# EAGLE board sensors_actuators_shieldv2_1 (EAGLE 6.6.0)
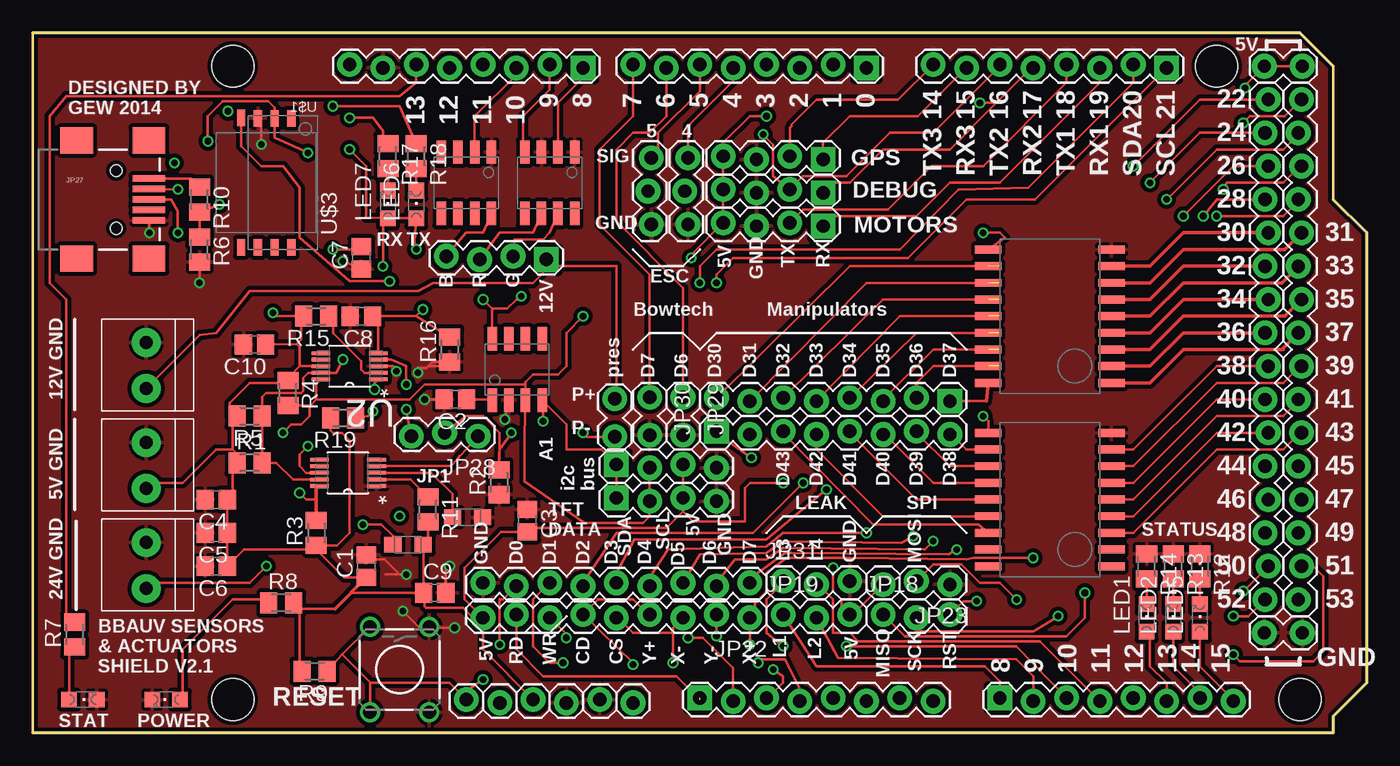
[diagram p0: board, top side]
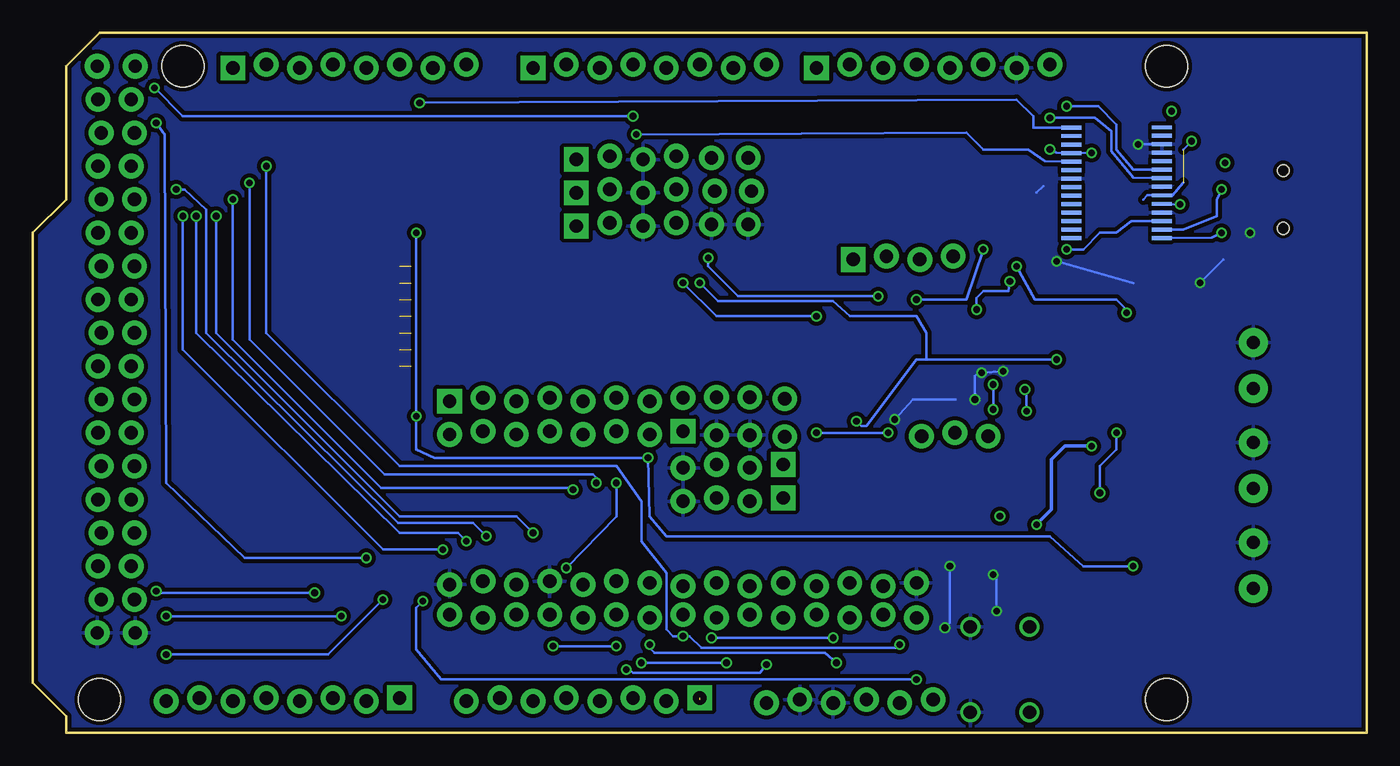
[diagram p1: board, bottom side, seen from below]

Size 101.6 x 53.34 mm. Coordinates in mm from the lower left corner, seen from the top.
Outline: 0,0 99.06,0 99.06,1.27 101.6,3.81 101.6,38.1 99.06,40.64 99.06,50.8 96.52,53.34 0,53.34 0,0
Copper layers (1*2*15*16): Top 0.035mm / dielectric 0.2mm / Route2 0.0175mm / dielectric 1.1mm / Route15 0.0175mm / dielectric 0.2mm / Bottom 0.035mm
Design rules "SeeedStudio_DRU_no_angle_20130527": minimum track width 6mil, minimum drill 12mil, track to track 6mil, track to pad 6mil, pad to pad 6mil, via to via 6mil, smd to smd 0mil, copper to edge 10mil, drill to drill 10mil, minimum pad ring 6mil, minimum via ring 6mil, stop-mask expansion 2mil, vias tented up to drill 25mil, thermal gap 10mil
Net classes: 0 default: width 0.178 mm, drill 0.508 mm, clearance 0.152 mm; 1 power: width 0.203 mm, drill 0.508 mm, clearance 1.27 mm
Holes 3.2 mm at 15.24,50.8 15.24,2.54 90.17,50.8 96.52,2.54

## Footprints (pad centres in the part's own frame; a part is rotated, then mirrored left to right if it is on the bottom)
0805 = smd 1.3 x 1.2: 1 -1.15,0; 2 1.15,0
C0805 = smd 1.3 x 1.5: 1 -0.85,0; 2 0.85,0
SOIC = smd 0.6 x 2: 1 -5.08,-4.7; 2 -3.81,-4.7; 3 -2.54,-4.7; 4 -1.27,-4.7; 5 0,-4.7; 6 1.27,-4.7; 7 2.54,-4.7; 8 3.81,-4.7; 9 5.08,-4.7; 10 5.08,4.7; 11 3.81,4.7; 12 2.54,4.7; 13 1.27,4.7; 14 0,4.7; 15 -1.27,4.7; 16 -2.54,4.7; 17 -3.81,4.7; 18 -5.08,4.7
1X2-3.5MM = drill 1 pad 2.184: 1 1.8,0; 2 -1.7,0
1X08_LOCK = drill 1.016 pad 1.88 square: 1 0,0.127 | drill 1.016 pad 1.88: 2 2.54,-0.127; 3 5.08,0.127; 4 7.62,-0.127; 5 10.16,0.127; 6 12.7,-0.127; 7 15.24,0.127; 8 17.78,-0.127
1X02_LOCK = drill 1.016 pad 1.88: 1 -0.178,0; 2 2.718,0
1X04_LOCK = drill 1.016 pad 1.88 square: 1 0,0.127 | drill 1.016 pad 1.88: 2 2.54,-0.127; 3 5.08,0.127; 4 7.62,-0.127
1X03_LOCK = drill 1.016 pad 1.88: 1 0,0.127; 2 2.54,-0.127; 3 5.08,0.127
1X16_LOCK = drill 1.016 pad 1.88: 1 0,0.127; 2 2.54,-0.127; 3 5.08,0.127; 4 7.62,-0.127; 5 10.16,0.127; 6 12.7,-0.127; 7 15.24,0.127; 8 17.78,-0.127; 9 20.32,0.127; 10 22.86,-0.127; 11 25.4,0.127; 12 27.94,-0.127; 13 30.48,0.127; 14 33.02,-0.127; 15 35.56,0.127; 16 38.1,-0.127
1X06_LOCK = drill 1.016 pad 1.88: 1 0,0; 2 2.54,-0.254; 3 5.08,0; 4 7.62,-0.254; 5 10.16,0; 6 12.7,-0.254
1X09_LOCK = drill 1.016 pad 1.88: 1 0,0.127; 2 2.54,-0.127; 3 5.08,0.127; 4 7.62,-0.127; 5 10.16,0.127; 6 12.7,-0.127; 7 15.24,0.127; 8 17.78,-0.127; 9 20.32,0.127
USB-MINIB = smd 2.5 x 0.5: D+ 2.5,0; D- 2.5,0.8; GND 2.5,-1.6; ID 2.5,-0.8; VBUS 2.5,1.6 | smd 2.5 x 2: MTN1 -3,4.5; MTN2 2.5,4.5; MTN3 -3,-4.5; MTN4 2.5,-4.5 | hole 0.9: 0,2.2; 0,-2.2
CHIPLED_0805 = smd 1.2 x 1.2: A 0,-1.05; C 0,1.05
SO-8 = smd 0.72 x 1.78: 1 -1.905,-2.34; 2 -0.635,-2.34; 3 0.635,-2.34; 4 1.905,-2.34; 5 1.905,2.34; 6 0.635,2.34; 7 -0.635,2.34; 8 -1.905,2.34
M0805 = smd 1.3 x 1.6: 1 -0.95,0; 2 0.95,0
TACTILE-PTH = drill 1.016: 1 -3.251,2.261; 2 3.251,2.261; 3 -3.251,-2.261; 4 3.251,-2.261
SOP50P490X110-10N = smd 1.422 x 0.279: 1 -2.184,0.991; 2 -2.184,0.508; 3 -2.184,0; 4 -2.184,-0.508; 5 -2.184,-0.991; 6 2.184,-0.991; 7 2.184,-0.508; 8 2.184,0; 9 2.184,0.508; 10 2.184,0.991
SSOP-28 = smd 1.5 x 0.3: 1 -3.45,4.2; 2 -3.45,3.575; 3 -3.45,2.925; 4 -3.45,2.275; 5 -3.45,1.625; 6 -3.45,0.975; 7 -3.45,0.325; 8 -3.45,-0.325; 9 -3.45,-0.975; 10 -3.45,-1.625; 11 -3.45,-2.275; 12 -3.45,-2.925; 13 -3.45,-3.575; 14 -3.45,-4.225; 15 3.45,-4.205; 16 3.45,-3.555; 17 3.45,-2.905; 18 3.45,-2.255; 19 3.45,-1.605; 20 3.45,-0.955; 21 3.45,-0.305; 22 3.45,0.345; 23 3.45,0.995; 24 3.45,1.645; 25 3.45,2.295; 26 3.45,2.945; 27 3.45,3.595; 28 3.45,4.22
SSOP-8 = smd 1.27 x 0.635: 1 4.915,-1.905; 2 4.915,-0.635; 3 4.915,0.635; 4 4.95,1.905; 5 -4.915,1.905; 6 -4.915,0.635; 7 -4.915,-0.635; 8 -4.915,-1.905

## Placement (x,y rotation side)
B1  MMZ2012Y152B0.4OHM,500MA  [0805]  33.12,16.43 0 top
B2  MMZ2012Y152B0.4OHM,500MA  [0805]  28.57,14.35 180 top
C1  1uF  [C0805]  25.4,12.7 90 top
C2  0.1uF  [C0805]  32.19,25.41 180 top
C3  0.22uF  [C0805]  37.66,16.18 270 top
C4  100nF  [C0805]  13.97,17.78 180 top
C5  100nF  [C0805]  13.97,15.24 180 top
C6  4.7uF  [C0805]  13.97,12.7 180 top
C7  1uF  [C0805]  25.02,36.2 90 top
C8  47pF  [C0805]  25.02,31.75 180 top
C9  100nF  [C0805]  30.61,10.67 0 top
C10  1uF  [C0805]  16.89,29.59 180 top
D1  ULN2803ADW  [SOIC]  77.47,17.78 90 top
D2  ULN2803ADW  [SOIC]  77.47,31.75 90 top
J1  1X2-3.5MM  [1X2-3.5MM]  8.64,27.94 90 top
J2  1X2-3.5MM  [1X2-3.5MM]  8.64,12.7 90 top
J3  1X2-3.5MM  [1X2-3.5MM]  8.64,20.32 90 top
JP1  [1X08_LOCK]  41.91,50.8 180 top
JP2  [1X08_LOCK]  63.5,50.8 180 top
JP3  [1X08_LOCK]  86.36,50.8 180 top
JP4  [1X02_LOCK]  93.98,50.8 0 top
JP5  [1X08_LOCK]  69.85,25.4 180 top
JP6  [1X08_LOCK]  52.07,22.86 0 top
JP7  [1X04_LOCK]  60.2,43.81 180 top
JP8  [1X04_LOCK]  60.2,41.27 180 top
JP9  [1X04_LOCK]  60.2,38.73 180 top
JP10  [1X03_LOCK]  46.99,43.81 270 top
JP11  [1X03_LOCK]  49.78,43.81 270 top
JP12  M16LOCK  [1X16_LOCK]  93.98,48.26 270 top
JP13  M16LOCK  [1X16_LOCK]  96.52,10.16 90 top
JP14  [1X02_LOCK]  93.98,7.62 0 top
JP15  [1X06_LOCK]  33.02,2.54 0 top
JP16  [1X08_LOCK]  50.8,2.54 0 top
JP17  [1X08_LOCK]  73.66,2.54 0 top
JP18  [1X03_LOCK]  64.77,8.89 0 top
JP19  [1X03_LOCK]  57.15,8.89 0 top
JP20  [1X04_LOCK]  44.45,20.32 0 top
JP21  [1X04_LOCK]  44.45,17.78 0 top
JP22  M09LOCK  [1X09_LOCK]  54.61,8.89 180 top
JP23  [1X03_LOCK]  69.85,11.43 180 top
JP24  [1X02_LOCK]  44.32,22.73 90 top
JP25  M09LOCK  [1X09_LOCK]  34.29,11.3 0 top
JP26  [1X04_LOCK]  39.12,36.2 180 top
JP27  USBSMD  [USB-MINIB]  6.35,40.64 0 top
JP28  [1X03_LOCK]  33.91,22.73 180 top
JP29  [1X02_LOCK]  49.53,25.4 270 top
JP30  [1X02_LOCK]  46.99,25.4 270 top
JP31  [1X03_LOCK]  57.15,11.43 0 top
LED1  BLUE  [CHIPLED_0805]  84.84,8.76 0 top
LED2  YELLOW  [CHIPLED_0805]  86.87,8.76 0 top
LED3  YELLOW  [CHIPLED_0805]  10.16,2.54 90 top
LED4  BLUE  [CHIPLED_0805]  3.81,2.54 270 top
LED5  RED  [CHIPLED_0805]  88.9,8.76 0 top
LED6  GREEN  [CHIPLED_0805]  29.21,40.26 0 top
LED7  GREEN  [CHIPLED_0805]  27.05,40.26 0 top
M1  IRF7910PBF  [SO-8]  39.37,41.91 180 top
M2  IRF7910PBF  [SO-8]  33.02,41.91 180 top
R1  1K  [M0805]  16.51,20.57 0 top
R2  250  [M0805]  35.51,19.1 90 top
R3  1K  [M0805]  21.59,15.24 90 top
R4  1K  [M0805]  19.43,25.91 270 top
R5  1K  [M0805]  16.51,24.13 180 top
R6  10k  [M0805]  12.7,36.83 270 top
R7  330  [M0805]  3.17,7.49 90 top
R8  330  [M0805]  18.92,9.91 0 top
R9  10k  [M0805]  21.46,4.7 180 top
R10  4k7  [M0805]  12.7,40.64 270 top
R11  1K  [M0805]  30.1,17.02 270 top
R12  330  [M0805]  88.9,12.7 270 top
R13  330  [M0805]  86.87,12.7 270 top
R14  330  [M0805]  84.84,12.7 270 top
R15  10K  [M0805]  21.59,31.75 180 top
R16  51K  [M0805]  31.75,29.21 90 top
R17  270  [M0805]  27.05,43.94 270 top
R18  270  [M0805]  29.21,43.94 270 top
R19  10K  [M0805]  23.62,24 180 top
S1  [TACTILE-PTH]  27.94,4.83 270 top
U1  ADS1115IDGST  [SOP50P490X110-10N]  24,19.81 180 top
U2  ADS1115IDGST  [SOP50P490X110-10N]  24.13,27.94 180 top
U$1  FT232RL  [SSOP-28]  19.05,41.91 0 bottom
U$2  HIH6130  [SO-8]  36.89,27.69 0 top
U$3  MPXH6250A  [SSOP-8]  17.78,41.91 90 top

## Library data of the parts
B1 B2 = bbauv; MPN: MMZ2012Y152B; OC_NEWARK: 89R3127
C1 C7 C10 = adafruit; MF: KEMET; MPN: C0805C105M4RACTU; OC_NEWARK: 42H5473
C2 = adafruit; MPN: 08055C104K4Z2A; OC_NEWARK: 10R5977
C3 = adafruit; MPN: CGA4J2X8R1E224K125AA; OC_NEWARK: 52W9749
C4 C5 C9 = adafruit; MPN: MC0805B104J500CT; OC_NEWARK: 06X6202
C6 = adafruit; MPN: C2012X5R1A475K125AA; OC_NEWARK: 04X3272
C8 = adafruit; MF: VISHAY/VITRAMON; MPN: VJ0805A470KXAMT; OC_NEWARK: 07J8429
D1 D2 = bbauv; MF: TEXAS INSTRUMENTS; MPN: ULN2803ADW; OC_NEWARK: 69K0711
J1-J3 = adafruit; MPN: 691103110002; OC_NEWARK: 16T1476
JP1-JP6 JP12-JP17 JP24 JP29 JP30 S1 = SparkFun; OC_NEWARK: unknown
JP7-JP11 JP18-JP23 JP25 JP26 JP28 JP31 = SparkFun-Connectors; OC_NEWARK: unknown
JP27 = SparkFun-Connectors; MF: MOLEX; MPN: 67503-1020; OC_NEWARK: 64K2160
LED1 LED4 = adafruit; MPN: 150080BS75000; OC_NEWARK: 95W3799
LED2 LED3 = adafruit; MPN: KP-2012SYCK-J3; OC_NEWARK: 96W6948
LED5 = adafruit; MPN: OVS-0808; OC_NEWARK: 15R2213
LED6 LED7 = adafruit; MF: SLI (CML/IDI); MPN: CMD17-21VGC/TR8; OC_NEWARK: 34C8661
M1 M2 = bbauv; MPN: IRF7910PBF; OC_NEWARK: 97K2234
R1 R3-R5 R11 = adafruit; MF: VISHAY/DALE; MPN: CRCW08051K00FKTA; OC_NEWARK: 05F1507
R2 = adafruit; MPN: PLTT0805Z2500AGTS; OC_NEWARK: 06X6591
R6 R9 = adafruit; MPN: MCHP05W4F1002T5E; OC_NEWARK: 01N6989
R7 R8 R12-R14 = adafruit; MPN: MCHP05W4F3300T5E; OC_NEWARK: 01N7024
R10 = adafruit; MPN: CR0805-JW-472ELF; OC_NEWARK: 06X5180
R15 R19 = adafruit; OC_NEWARK: unknown
R16 = adafruit; MF: OUTSOURCE ITEM; MPN: RR1220P-513-B-T5; OC_NEWARK: 28K1234
R17 R18 = adafruit; MPN: MC0805S8F2700T5E; OC_NEWARK: 79M6064
U1 U2 = bbauv; MPN: ADS1115IDGST; OC_FARNELL: 1762981; OC_NEWARK: 25R1241; PACKAGE: MSOP-10; SUPPLIER: Texas Instruments
U$1 U$3 = bbauv; OC_NEWARK: unknown
U$2 = bbauv; MPN: HIH6131-021-001; OC_NEWARK: 55T1170

## Nets
3.3: JP15.2
5V: B2.1 C1.1 C3.2 C4.1 C5.1 C6.1 C9.1 C10.1 J3.2 JP4.1 JP4.2 JP7.4 JP8.4 JP9.4 JP15.3 JP19.3 JP20.3 JP21.3 JP22.9 JP23.3 LED6.A LED7.A R1.1 R3.1 R4.1 R5.2 R8.2 R9.2 R11.2 R15.2 R19.2 U2.8 U$1.4 U$1.20 U$2.8 U$3.2
12V: J1.2 JP24.2 JP26.1
24V: D1.10 D2.10 J2.2 JP6.1
A0: JP16.1 JP22.8
A1: JP16.2 JP22.7
A2: JP16.3 JP22.4 JP22.6
A3: JP16.4 JP22.3 JP22.5
A4: JP16.5
A5: JP16.6
A6: JP16.7
A7: JP16.8
A8: JP17.1 JP19.1
A9: JP17.2 JP19.2
A10: JP17.3 JP31.1
A11: JP17.4 JP31.2
A12: JP17.5
A13: JP17.6 LED1.A
A14: JP17.7 LED2.A
A15: JP17.8 LED5.A
AREF: JP1.8
D2: JP2.3
D3: JP2.4
D4: JP2.5 JP11.1
D5: JP2.6 JP10.1
D6: JP2.7 JP29.1
D7: JP2.8 JP30.1
D8: JP1.1 M1.2
D9: JP1.2 M1.4
D10: JP1.3 M2.2
D11: JP1.4
D12: JP1.5
D13: JP1.6 R7.2
D22: JP12.1 JP22.2 JP25.2
D23: JP13.16 JP22.1 JP25.3
D24: JP12.2 JP25.4
D25: JP13.15 JP25.5
D26: JP12.3 JP25.6
D27: JP13.14 JP25.7
D28: JP12.4 JP25.8
D29: JP13.13 JP25.9
D30: D2.8 JP12.5
D31: D2.7 JP13.12
D32: D2.6 JP12.6
D33: D2.5 JP13.11
D34: D2.4 JP12.7
D35: D2.3 JP13.10
D36: D2.2 JP12.8
D37: D2.1 JP13.9
D38: D1.8 JP12.9
D39: D1.7 JP13.8
D40: D1.6 JP12.10
D41: D1.5 JP13.7
D42: D1.4 JP12.11
D43: D1.3 JP13.6
D44: JP12.12
D45: JP13.5
D46: JP12.13
D47: JP13.4
D48: JP12.14
D49: JP13.3
D50: JP12.15 JP18.1
D51: JP13.2 JP23.2
D52: JP12.16 JP18.2
D53: JP13.1
GND: B1.2 C1.2 C2.2 C3.1 C4.2 C5.2 C6.2 C7.1 C8.2 C9.2 C10.2 D1.9 D2.9 J1.1 J2.1 J3.1 JP1.7 JP7.3 JP8.3 JP9.3 JP10.3 JP11.3 JP14.1 JP14.2 JP15.4 JP15.5 JP20.4 JP21.4 JP23.1 JP25.1 JP27.GND JP29.2 JP30.2 JP31.3 LED3.C LED4.C M1.1 M1.3 M2.1 R2.1 R6.2 R12.1 R13.1 R14.1 R16.1 S1.1 S1.2 U1.1 U2.3 U$1.7 U$1.18 U$1.21 U$1.25 U$1.26 U$2.2 U$3.3
N$1: R6.1 R10.2 U$1.19
N$2: LED7.C R17.2
N$3: D1.16 JP6.3
N$4: D1.15 JP6.4
N$5: JP28.1 U1.4
N$6: B1.1 U1.3
N$7: D1.14 JP6.5
N$8: D1.13 JP6.6
N$9: D1.12 JP6.7
N$10: D1.11 JP6.8
N$11: D2.18 JP5.1
N$12: D2.17 JP5.2
N$13: D2.14 JP5.5
N$14: D2.15 JP5.4
N$15: D2.11 JP5.8
N$16: D2.13 JP5.6
N$17: D2.12 JP5.7
N$18: JP26.2 M1.7
N$19: D2.16 JP5.3
N$20: JP26.3 M1.6
N$21: JP26.4 M2.8
N$22: R11.1 U1.2
N$23: C2.1 U$2.1
N$24: B2.2 U1.8
N$25: LED1.C R14.2
N$26: JP27.VBUS R10.1
N$27: C7.2 U$1.17
N$28: LED2.C R13.2
N$29: LED5.C R12.2
N$30: R15.1 U2.2
N$31: LED6.C R18.2
N$34: R19.1 U2.1
N$126: LED3.A R8.1
N$127: LED4.A R7.1
PRES_SENSE: C8.1 R16.2 U2.5 U$3.4
RES: JP15.1 JP18.3 R9.1 S1.3 S1.4
RX0: JP2.1
RX1: JP3.3 JP9.1
RX2: JP3.5 JP8.1 U$1.1
RX3: JP3.7 JP7.1
RXLED: R17.1 U$1.22
SCL: JP3.1 JP20.2 JP21.2 R3.2 R4.2 U1.10 U2.10 U$2.3
SDA: JP3.2 JP20.1 JP21.1 R1.2 R5.1 U1.9 U2.9 U$2.4
SENSE: JP24.1 JP28.2 R2.2
SENSE2: JP28.3 U2.4
TX0: JP2.2
TX1: JP3.4 JP9.2
TX2: JP3.6 JP8.2 U$1.5
TX3: JP3.8 JP7.2
TXLED: R18.1 U$1.23
USBDM: JP27.D- U$1.16
USBDP: JP27.D+ U$1.15
VIN: JP15.6

## Tracks (layer width: path | path; a pad name or v marks a point on that pad's centre or on a via)
5V  (via drill 0.51)  (1 unrouted)
  Top 0.178: JP20.3 JP21.3 49.53,16.89 | R8.2 20.32,9.46 | 20.32,9.46 20.32,5.08 20.51,4.89 R9.2 | 20.32,9.46 23.01,9.46 24.22,10.67 C9.1 | v50.16,36.2 50.16,36.45 JP9.4 JP8.4 JP7.4 52.58,44.96 54.61,46.99 v55.88,46.99 | 34.98,32.33 U$2.8 | 15.24,21.59 15.24,23.81 R5.2 14.99,24.13 14.99,25.15 16.51,26.67 19.24,26.67 R4.1 19.43,27.05 20.32,27.94 | J3.2 9.07,19.05 11.43,19.05 13.97,21.59 15.24,21.59 | v13.34,45.09 13.34,46.99 14.48,48.13 17.91,48.13 18.41,47.62 U$3.2 18.41,45.34 v20.95,44.2 | R15.2 20.45,31.56 20.45,29.97 20.11,29.63 | 20.11,29.63 C10.1 | LED7.A LED6.A 29.05,36.83 v29.21,36.83 | v34.29,33.02 34.98,32.33 | U2.8 20.32,27.94 | 15.24,21.59 15.56,21.27 R1.1 15.24,20.25 15.24,17.78 C4.1 C5.1 C6.1 16.09,13.97 21.59,13.97 | 21.59,13.97 R3.1 23.18,14.29 24.13,15.24 24.13,22.29 23.56,22.86 22.86,22.86 22.67,23.05 R19.2 | 21.59,13.97 23.71,11.85 C1.1 | 20.64,32.07 R15.2 | 20.11,29.63 20.32,29.41 20.32,27.94 | JP23.3 62.48,9.02 JP19.3 61.59,9.65 61.59,10.16 60.96,10.79 v60.96,12.57 | v18.29,32 18.54,31.75 R15.2 | C9.1 29.76,14.32 B2.1 30.1,14.72 R11.2 | C9.1 29.84,10.58 29.84,9.65 29.97,9.53 32.77,9.53 33.53,8.76 JP22.9 | JP15.3 34.29,6.35 JP22.9 | JP22.9 32.89,10.16 32.89,12.57 35.65,15.33 C3.2 37.95,15.62 48.26,15.62 49.53,16.89 | 49.53,16.89 50.29,16.13 54.23,16.13 54.23,18.67 54.61,19.05 v57.15,19.05 | v92.33,49.15 92.33,49.33 JP4.1 JP4.2 | v26.67,35.56 26.67,38.83 LED7.A | 34.98,32.33 36.13,32.33 36.83,33.02 36.96,33.02 v37.21,33.27 | LED7.A 25.4,39.24 25.4,43.18 v24.13,44.45
  Top 0.254: 23.01,9.46 C1.1
  Bottom 0.178: v50.16,36.2 50.16,35.56 47.88,33.27 v37.21,33.27 | v29.21,36.83 30.48,33.02 v34.29,33.02 | v26.67,35.56 25.27,33.02 19.05,33.02 18.29,32.26 v18.29,32 | v60.96,12.57 57.15,16.51 v57.15,19.05 | v55.88,46.99 90.17,46.99 v92.33,49.15 | 17.02,40.64 16.7,40.95 U$1.20 14.86,40.89 13.97,41.91 | v24.13,44.45 23.62,44.2 U$1.4 v20.95,44.2 | v13.34,45.09 13.97,44.45
12V
  Top 0.178: J1.2 12.7,30.3 13.97,30.48 16.51,33.66 29.34,33.66 30.48,34.29 38.1,34.29 39.37,35.56 | JP24.2 44.45,25.58 44.45,35.56 39.37,35.56 | 39.37,35.56 JP26.1
24V  (via drill 0.51)
  Top 0.178: v72.39,38.1 73.66,38.1 74.04,37.72 D2.10 | v72.39,24.13 72.77,23.75 D1.10 | v54.74,20.95 52.07,22.86 JP6.1 | J2.2 9.07,11.43 16.51,11.43 v17.78,12.7
  Bottom 0.178: v72.39,38.1 v72.39,24.13 72.39,21.59 70.99,20.95 | v54.74,20.95 54.61,16.51 53.34,14.99 24.13,14.99 21.59,12.7 v17.78,12.7
  Bottom 0.203: v54.74,20.95 70.99,20.95
A0  (1 unrouted)
  Top 0.178: 50.8,2.54 49.02,4.32 38.86,4.32 36.83,6.35 JP22.8
A1  (via drill 0.51)
  Top 0.178: 53.21,2.54 JP16.2 53.34,4.95 51.05,7.24 v49.91,7.24 | v40.64,7.24 40.64,7.49 JP22.7
  Bottom 0.178: v49.91,7.24 v40.64,7.24
A2  (via drill 0.51)
  Top 0.178: v45.72,5.21 45.72,5.33 JP22.6 43.05,10.16 45.72,10.16 46.86,9.02 JP22.4 | JP16.3 56.01,2.67 57.15,3.81 57.15,4.32 v56.39,4.83
  Bottom 0.178: v45.72,5.21 46.23,4.57 55.88,4.57 56.13,4.83 v56.39,4.83
A3  (via drill 0.51)
  Top 0.178: JP16.4 58.42,3.3 57.28,5.59 55.37,5.59 55.24,5.46 v55.24,5.33 | v48.77,5.33 48.77,7.62 | 48.77,7.62 48.77,8 JP22.3 | JP22.5 44.58,8.76 45.72,7.62 48.77,7.62
  Bottom 0.178: v48.77,5.33 v55.24,5.33
A8
  Top 0.178: JP19.1 59.69,5.08 72.52,5.08 73.66,3.94 JP17.1
A9
  Top 0.178: JP19.2 61.34,5.71 74.93,5.59 76.2,4.32 JP17.2
A10  (via drill 0.51)
  Top 0.178: JP17.3 74.93,6.6 v61.98,6.6 | 57.15,11.3 JP31.1 57.15,11.43 55.88,10.16 55.88,7.62 v57.15,6.6
  Bottom 0.178: v61.98,6.6 v57.15,6.6
A11
  Top 0.178: JP17.4 76.71,6.99 62.87,6.99 62.23,7.62 60.96,7.62 60.96,10.16 59.82,11.3 JP31.2
A13
  Top 0.178: LED1.A 85.09,7.46 85.09,5.08 86.36,3.81 JP17.6
A14
  Top 0.178: LED2.A 86.87,5.08 88.9,3.05 JP17.7
A15
  Top 0.178: LED5.A 88.9,5.08 91.44,2.54 JP17.8
D4
  Top 0.178: JP11.1 49.91,46.23 53.34,49.66 JP2.5
D5
  Top 0.178: JP10.1 47.62,44.32 47.62,45.72 50.8,48.9 JP2.6
D6
  Top 0.178: JP2.7 48.26,46.99 46.99,45.72 45.72,45.72 44.45,44.45 44.45,38.99 49.53,33.91 JP29.1
D7
  Top 0.178: JP2.8 45.72,46.99 43.18,44.45 43.18,38.73 46.99,34.92 JP30.1
D8
  Top 0.178: M1.2 40.01,48.01 41.91,49.91 JP1.1
D9
  Top 0.178: M1.4 37.34,44.38 37.34,46.99 39.37,49.02 JP1.2
D10
  Top 0.178: M2.2 33.66,46.99 36.83,50.16 JP1.3
D13
  Top 0.178: 29.21,50.8 JP1.6 29.21,49.53 27.94,48.51 2.54,48.51 1.27,46.99 1.27,34.29 2.54,33.02 2.54,9.08 R7.2
D22  (via drill 0.51)
  Top 0.178: JP12.1 88.9,48.26 v83.82,43.18 | JP22.2 v52.07,7.37 | v35.56,6.73 35.56,10.16 35.81,10.16 JP25.2
  Bottom 0.178: v83.82,43.18 83.82,30.48 73.66,20.32 57.15,20.32 55.24,17.65 55.24,14.61 53.34,12.19 53.34,7.87 52.83,7.37 v52.07,7.37 51.56,7.37 50.67,6.48 35.81,6.48 v35.56,6.73
D23  (via drill 0.51)
  Top 0.178: JP13.16 95.38,46.99 92.71,46.99 v92.2,46.48 | v76.2,13.34 71.63,13.34 71.12,13.21 62.23,13.34 57.4,13.34 55.88,12.19 55.88,10.79 54.99,9.91 54.99,9.14 JP22.1 v54.61,6.73 | JP25.3 38.1,10.16 38.1,6.6 39.37,5.33 v40.39,5.33
  Bottom 0.178: v92.2,46.48 91.57,45.59 91.44,19.05 85.47,13.34 v76.2,13.34 | v54.61,6.73 54.61,6.48 54.23,6.1 41.27,6.1 v40.39,5.33
D24  (via drill 0.51)
  Top 0.178: v85.09,41.91 88.9,45.72 JP12.2 | JP25.4 41.91,11.43 44.45,15.24 54.86,15.24 v58.67,19.05
  Bottom 0.178: v85.09,41.91 85.09,29.97 74.8,19.68 58.93,19.68 58.67,19.43 v58.67,19.05
D25  (via drill 0.51)
  Top 0.178: v86.36,40.64 90.17,44.45 95.25,44.45 96.39,45.59 JP13.15 | v60.45,18.54 55.88,14.73 45.85,14.73 44.45,12.19 JP25.5
  Bottom 0.178: v60.45,18.54 60.58,18.67 75.06,18.67 86.36,29.97 v86.36,40.64
D26  (via drill 0.51)
  Top 0.178: v87.63,39.37 91.44,43.18 JP12.3 | v63.5,15.24 57.15,15.24 55.88,14.22 48.39,13.97 46.99,11.81 JP25.6
  Bottom 0.178: v63.5,15.24 64.77,16.51 73.66,16.51 87.63,30.48 v87.63,39.37
D27  (via drill 0.51)
  Top 0.178: v90.68,41.4 90.93,41.91 95.25,41.91 96.52,43.18 JP13.14 | v67.06,14.99 66.17,14.48 57.15,14.61 55.88,13.72 50.8,13.59 JP25.7
  Bottom 0.178: v67.06,14.99 68.07,16 73.79,16 88.39,30.48 88.39,39.88 90.04,41.4 v90.68,41.4
D28  (via drill 0.51)
  Top 0.178: v89.15,39.37 90.17,40.64 JP12.4 | v68.58,14.61 67.94,13.97 57.15,14.1 55.88,13.21 53.47,13.21 52.07,11.43 JP25.8
  Bottom 0.178: v68.58,14.61 69.22,15.24 73.66,15.24 89.15,30.48 v89.15,39.37
D29  (via drill 0.51)
  Top 0.178: v90.17,39.37 95.25,39.37 96.39,40.51 JP13.13 | v70.36,13.97 69.72,13.59 57.78,13.72 57.28,13.72 55.24,12.19 JP25.9
  Bottom 0.178: v70.36,13.97 74.93,13.97 90.17,29.21 v90.17,39.37
D30
  Top 0.254: D2.8 85.09,35.56 87.63,38.1 JP12.5
D31
  Top 0.254: D2.7 85.09,34.29 87.63,36.83 95.38,36.83 JP13.12
D32
  Top 0.254: D2.6 85.09,33.02 87.63,35.56 JP12.6
D33
  Top 0.254: D2.5 85.09,31.75 87.63,34.29 95.12,34.29 JP13.11
D34
  Top 0.254: D2.4 85.09,30.48 87.63,33.02 JP12.7
D35
  Top 0.254: D2.3 85.09,29.21 87.63,31.75 95.38,31.75 JP13.10
D36
  Top 0.254: D2.2 85.09,27.94 87.63,30.48 JP12.8
D37
  Top 0.254: D2.1 85.09,26.67 87.63,29.21 95.25,29.21 95.25,29.34 JP13.9
D38
  Top 0.178: D1.8 83.82,21.59 90.17,27.94 JP12.9
D39
  Top 0.178: D1.7 83.82,20.32 90.17,26.67 95.25,26.67 96.52,27.94 JP13.8
D40
  Top 0.178: D1.6 83.82,19.05 90.17,25.4 JP12.10
D41
  Top 0.178: D1.5 83.82,17.78 90.17,24.13 95.25,24.13 96.39,25.27 JP13.7
D42
  Top 0.178: D1.4 83.82,16.51 90.17,22.86 JP12.11
D43
  Top 0.178: D1.3 83.82,15.24 90.17,21.59 95.25,21.59 96.52,22.86 JP13.6
D50  (via drill 0.51)
  Top 0.178: JP12.15 v92.2,10.79 | v80.14,10.67 80.14,8.76 78.74,7.37 66.42,7.37 JP18.1
  Bottom 0.178: v92.2,10.79 92.08,10.67 v80.14,10.67
D51  (via drill 0.51)
  Top 0.178: JP13.2 97.54,12.7 98.3,11.94 98.3,6.22 97.54,5.46 91.95,5.46 v91.44,5.97 | v74.93,10.16 73.66,11.43 72.14,11.43 70.74,12.83 68.58,12.83 JP23.2
  Bottom 0.178: v91.44,5.97 79.12,5.97 v74.93,10.16
D52  (via drill 0.51)
  Top 0.178: JP12.16 92.58,8.89 v91.44,8.89 | v78.11,8.89 76.2,7.75 67.31,7.75 JP18.2
  Bottom 0.178: v91.44,8.89 v78.11,8.89
GND  (via drill 0.51)
  Top 0.178: 30.1,27.94 30.42,28.26 R16.1 | 26.89,12.06 27.94,12.06 | 27.94,12.06 v28.45,12.06 | v28.19,9.27 29.84,7.62 30.48,7.62 | 30.48,7.62 30.2,7.9 S1.1 | R6.2 v12.7,34.29 | v8.89,38.1 8.85,38.14 JP27.GND | C1.2 25.74,13.21 26.8,13.21 27.94,12.06 | U2.3 27.43,27.94 27.56,27.81 v27.69,27.56 | v29.34,27.43 29.34,27.81 29.97,27.81 30.1,27.94 | 30.1,27.94 31.75,27.94 | C2.2 31.33,25.4 v29.84,25.4 | C9.2 31.46,12.41 v31.75,12.7 | v32.13,8 30.86,8 30.48,7.62 | v17.4,44.83 17.4,46.57 U$3.3 | C7.1 v23.62,35.94 | U$2.2 v35.94,23.88
  Bottom 0.178: 24.64,41.66 25.15,41.15 | v28.45,12.06 28.19,11.81 v28.19,9.27 | v12.7,34.29 10.92,36.07 | v27.69,27.56 v29.34,27.43 29.46,27.56 29.84,27.18 v29.84,25.4 | v31.75,12.7 31.75,8.38 v32.13,8 | U$1.26 17.38,44.85 v17.4,44.83 | v23.62,35.94 17.78,34.29 | v35.94,23.88 34.54,25.4 C2.2
  pour Bottom (isolate 0.305): 0,0 99.06,0 99.06,1.27 101.6,3.81 101.6,38.1 99.06,40.64 99.06,50.8 96.52,53.34 0,53.34 0,2.54
  pour Top (isolate 0.305): 0,0 99.06,0 99.06,1.27 101.6,3.81 101.6,38.1 99.06,40.64 99.06,50.8 96.52,53.34 0,53.34 0,2.54
N$1  (via drill 0.51)
  Top 0.178: R6.1 R10.2 v14.22,40.26
  Bottom 0.178: v14.22,40.26 U$1.19
N$2
  Top 0.178: R17.2 LED7.C
N$3
  Top 0.178: D1.16 72.01,15.88 64.01,15.88 57.15,22.86 JP6.3
N$4
  Top 0.178: D1.15 64.77,16.51 59.69,21.59 JP6.4
N$5
  Top 0.178: 32.51,21.08 32.34,20.88 | 32.34,20.88 31.88,20.32 U1.4 | JP28.1 32.34,20.88
N$6
  Top 0.178: U1.3 30.35,19.81 31.96,18.2 B1.1
N$7
  Top 0.178: D1.14 67.31,17.78 62.23,22.86 JP6.5
N$8
  Top 0.178: D1.13 68.58,19.05 64.9,22.73 JP6.6
N$9
  Top 0.178: D1.12 69.85,20.32 67.31,22.86 JP6.7
N$10
  Top 0.178: D1.11 71.12,21.59 69.98,22.73 JP6.8
N$11
  Top 0.203: JP5.1 72.64,25.27
  Top 0.254: 72.64,25.27 D2.18
N$12  (1 unrouted)
  Top 0.203: 67.31,26.67 68.58,27.94 73.66,27.94
  Top 0.254: JP5.2 67.31,26.67
N$13  (1 unrouted)
  Top 0.203: JP5.5 66.04,31.75 73.66,31.75
N$14  (1 unrouted)
  Top 0.203: JP5.4 67.31,30.48 73.66,30.48
N$15  (1 unrouted)
  Top 0.203: JP5.8 62.23,35.56 73.66,35.56
N$16  (1 unrouted)
  Top 0.203: JP5.6 64.77,33.02 73.66,33.02
N$17  (1 unrouted)
  Top 0.203: JP5.7 63.5,34.29 73.66,34.29
N$18
  Top 0.178: M1.7 39.37,38.1 38.86,37.59 36.7,37.59 JP26.2
N$19  (1 unrouted)
  Top 0.203: 64.77,25.4 68.58,29.21 73.66,29.21
  Top 0.254: JP5.3 64.77,25.4
N$20
  Top 0.178: JP26.3 35.56,38.1 38.1,38.1 M1.6
N$21
  Top 0.178: M2.8 34.29,38.1 33.02,38.1 JP26.4
N$22
  Top 0.178: U1.2 28.76,19.3 R11.1
N$23
  Top 0.178: U$2.1 34.92,25.41 C2.1
N$24  (via drill 0.51)
  Top 0.178: v20.95,21.84 20.32,21.21 20.32,20.32 20.83,19.81 U1.8 | B2.2 27.43,14.99 26.54,15.88 v25.15,15.88
  Bottom 0.254: v20.95,21.84 22.99,21.84 24,20.83 24,17.02 v25.15,15.88
N$25
  Top 0.178: R14.2 LED1.C
N$26
  Top 0.178: R10.1 12.05,42.24 JP27.VBUS
N$27  (via drill 0.51)
  Top 0.178: 24.51,37.55 C7.2 24.13,36.83 v22.86,36.83
  Bottom 0.178: U$1.17 17.91,38.99 19.05,38.1 20.32,38.1 21.59,36.83 v22.86,36.83
N$28
  Top 0.178: R13.2 LED2.C
N$29
  Top 0.178: LED5.C R12.2
N$30
  Top 0.178: U2.2 25.27,27.43 25.02,27.69 25.02,28.32 22.86,30.48 22.86,31.43 R15.1
N$31
  Top 0.178: R18.2 LED6.C
N$32  (via drill 0.51)
  other vias: 14.86,47.37
N$34  (via drill 0.51)
  Top 0.178: U2.1 26.04,26.67 v26.04,26.16 | v25.91,24.51 25.53,24.13 R19.1
  Bottom 0.178: v26.04,26.16 25.91,26.04 v25.91,24.51
N$35  (via drill 0.51)
  other vias: 10.79,43.43
N$41  (via drill 0.51)
  other vias: 27.94,16.51
N$126
  Top 0.178: R8.1 17.97,9.97 17.78,10.16 15.24,10.16 11.43,6.35 11.43,2.54 LED3.A
N$127
  Top 0.178: R7.1 2.76,6.13 LED4.A
PRES_SENSE  (via drill 0.51)
  Top 0.178: U$3.4 15.88,44.7 17.4,43.18 19.05,43.18 20.32,41.53 20.32,37.72 24.13,34.42 v27.18,34.42 | v29.72,32.26 29.21,31.75 | 29.21,31.75 R16.2 | 29.21,31.75 C8.1 26.31,31.3 U2.5
  Bottom 0.178: v27.18,34.42 27.3,33.66 29.21,33.66 29.72,33.15 v29.72,32.26
RES  (via drill 0.51)
  Top 0.178: 25.68,3.81 25.68,3.86 23.57,5.97 S1.3 | 25.68,3.81 S1.4 | 25.68,3.81 31.75,3.81 JP15.1 33.02,3.17 v34.29,4.06 | JP18.3 70.87,10.03 v71.88,10.03
  Top 0.203: R9.1 23.57,5.97
  Bottom 0.178: v71.88,10.03 72.39,9.53 72.39,6.35 70.48,4.06 v34.29,4.06
RX1
  Top 0.178: JP9.1 60.96,39.37 67.31,39.37 69.85,41.91 73.66,41.91 81.28,49.53 JP3.3
RX2  (via drill 0.51)
  Top 0.178: JP8.1 60.96,41.91 62.23,41.91 64.77,44.45 69.85,44.45 73.41,48.01 | 73.41,48.01 76.07,50.67 JP3.5 | v72.14,48.01 73.41,48.01
  Bottom 0.178: v72.14,48.01 26.67,48.26 25.4,46.99 25.4,46.1 U$1.1
RX3
  Top 0.178: JP3.7 67.44,46.99 62.23,46.99 60.2,44.96 JP7.1
RXLED  (via drill 0.51)
  Top 0.178: 26.67,44.51 26.67,44.45 26.8,44.32 27.18,44.32 27.05,44.45 R17.1 26.67,44.51 | 26.67,44.51 26.67,45.85 25.91,46.86 v24.13,46.86
  Bottom 0.178: v24.13,46.86 20.7,46.86 19.43,45.85 19.43,44.32 17.78,42.29 U$1.22
SCL  (via drill 0.51)
  Top 0.178: JP20.2 JP21.2 46.99,16.51 46.48,16 42.04,16 37.47,19.18 37.47,22.74 U$2.3 37.52,26.73 | JP3.1 76.33,40.64 71.12,40.64 66.67,36.2 53.34,36.2 52.07,34.92 v52.07,34.29 | 21.59,25.4 21.15,24.96 | 21.15,24.96 R4.2 | 21.15,24.96 21.08,24.89 21.08,24.13 20.45,23.5 19.68,23.5 v19.05,22.86 | v20.32,18.29 20.83,17.78 21.59,17.78 | v41.91,31.75 40.64,30.48 40.64,27.94 40.01,27.3 38.1,27.3 37.52,26.73 | 37.52,26.73 37.47,26.54 29.84,26.54 28.7,25.4 21.59,25.4 | U2.10 21.59,26.59 21.59,25.4
  Top 0.254: R3.2 21.59,17.78 21.59,18.59 U1.10
  Bottom 0.178: v52.07,34.29 49.53,31.75 v41.91,31.75 | v19.05,22.86 19.05,21.59 20.32,20.32 v20.32,18.29
SDA  (via drill 0.51)
  Top 0.178: JP21.1 JP20.1 43.31,21.59 40.64,21.59 40.64,23.5 U$2.4 38.86,25.28 v38.86,23.75 | v23.62,28.45 23.11,27.43 U2.9 20.95,27.43 20.57,27.05 20.57,26.04 20.45,25.91 17.78,25.91 17.46,25.59 R5.1 R1.2 18.54,20.57 19.81,19.3 U1.9 | JP3.2 83.82,49.53 75.82,41.53 70.48,41.4 66.04,36.83 52.07,36.83 50.8,35.56 v50.8,34.29
  Bottom 0.178: v38.86,23.75 38.48,23.37 38.1,23.37 34.29,28.45 33.53,28.45 | 33.53,28.45 v23.62,28.45 | v50.8,34.29 49.4,32.89 40.64,32.89 39.37,31.75 34.29,31.75 33.53,30.48 33.53,28.45
SENSE  (via drill 0.51)
  Top 0.178: v41.91,22.86 42.22,22.55 JP24.1 | v36.45,22.86 35.56,21.59 R2.2 35.56,22.86 34.29,24.13 33.02,24.13 JP28.2
  Bottom 0.178: v36.45,22.86 v41.91,22.86
SENSE2  (via drill 0.51)
  Top 0.178: U2.4 27.3,28.45 28.45,27.94 v28.45,26.54 | JP28.3 v28.45,24.64
  Bottom 0.178: v28.45,26.54 v28.45,24.64
TX1
  Top 0.178: JP9.2 58.67,39.88 65.15,39.88 68.45,43.18 72.39,43.18 78.74,49.53 JP3.4
TX2  (via drill 0.51)
  Top 0.178: JP3.6 73.66,50.8 68.58,45.72 65.28,45.72 61.98,42.42 58.67,42.42 JP8.2 56.39,42.42 56.39,44.83 v55.63,45.59
  Bottom 0.178: v55.63,45.59 30.48,45.72 29.21,44.45 25.78,44.45 24.51,43.56 U$1.5
TX3
  Top 0.178: JP3.8 65.91,48.26 59.69,48.26 57.78,46.35 57.78,46.23 57.66,46.1 JP7.2
TXLED  (via drill 0.51)
  Top 0.178: R18.1 27.94,47.75 v22.86,47.75
  Bottom 0.178: U$1.23 17.78,42.93 19.05,44.45 19.05,46.35 20.45,47.75 v22.86,47.75
USBDM  (via drill 0.51)
  Top 0.178: v11.05,41.4 JP27.D-
  Bottom 0.178: U$1.16 13.97,38.35 11.43,39.37 11.43,40.64 v11.05,41.4
USBDP  (via drill 0.51)
  Top 0.178: JP27.D+ 10.54,40.64 11.05,39.75 v11.05,38.1
  Bottom 0.178: v11.05,38.1 11.81,37.72 U$1.15

## Text on the board
tPlace: 5V | 9 | 8 | 7 | 6 | 5 | 4 | 3 | 2 | 1 | 0 | 22 | DESIGNED BY / GEW 2014 | 14 | 15 | 16 | 17 | 18 | 19 | 20 | 21 | 13 | 12 | 11 | 10 | 5 | 4 | 24 | SIG | GPS | 26 | TX3 | RX3 | TX2 | RX2 | TX1 | RX1 | SDA | SCL | DEBUG | 28 | GND | MOTORS | RX | TX | 30 | 31 | 5V | GND | TX | RX | 32 | 33 | B | R | G | ESC | 12V | Bowtech | Manipulators | 34 | 35 | 36 | 37 | pres | D7 | D6 | D30 | D31 | D32 | D33 | D34 | D35 | D36 | D37 | 38 | 39 | 12V GND | P+ | 40 | 41 | P- | 42 | 43 | A1 | D43 | D42 | D41 | D40 | D39 | D38 | 44 | 45 | JP1 | 5V GND | i2c / bus | SDA | SCL | 5V | GND | LEAK | SPI | 46 | 47 | TFT / DATA | STATUS | 48 | 49 | GND | D0 | D1 | D2 | D3 | D4 | D5 | D6 | D7 | L3 | L4 | GND | MOSI | 50 | 51 | 24V GND | 52 | 53 | 5V | L1 | L2 | 5V | BBAUV SENSORS / & ACTUATORS / SHIELD V2.1 | RD | WR | CD | CS | Y+ | X- | Y- | X+ | SCK | RST | 8 | 9 | 10 | 11 | 12 | 13 | 14 | 15 | GND | MISO | RESET | STAT | POWER